# Altium PCB FYP_POWERBOARD_60V100A_REV2.PcbDoc
Units mm, origin at the board's own origin, x right, y up, seen from the top; angles counter-clockwise.
Board outline 32.45 x 70.99 mm, 2 copper layers (Top Layer, Bottom Layer); 48 components, 39 nets, 215 pads, 937 vias.
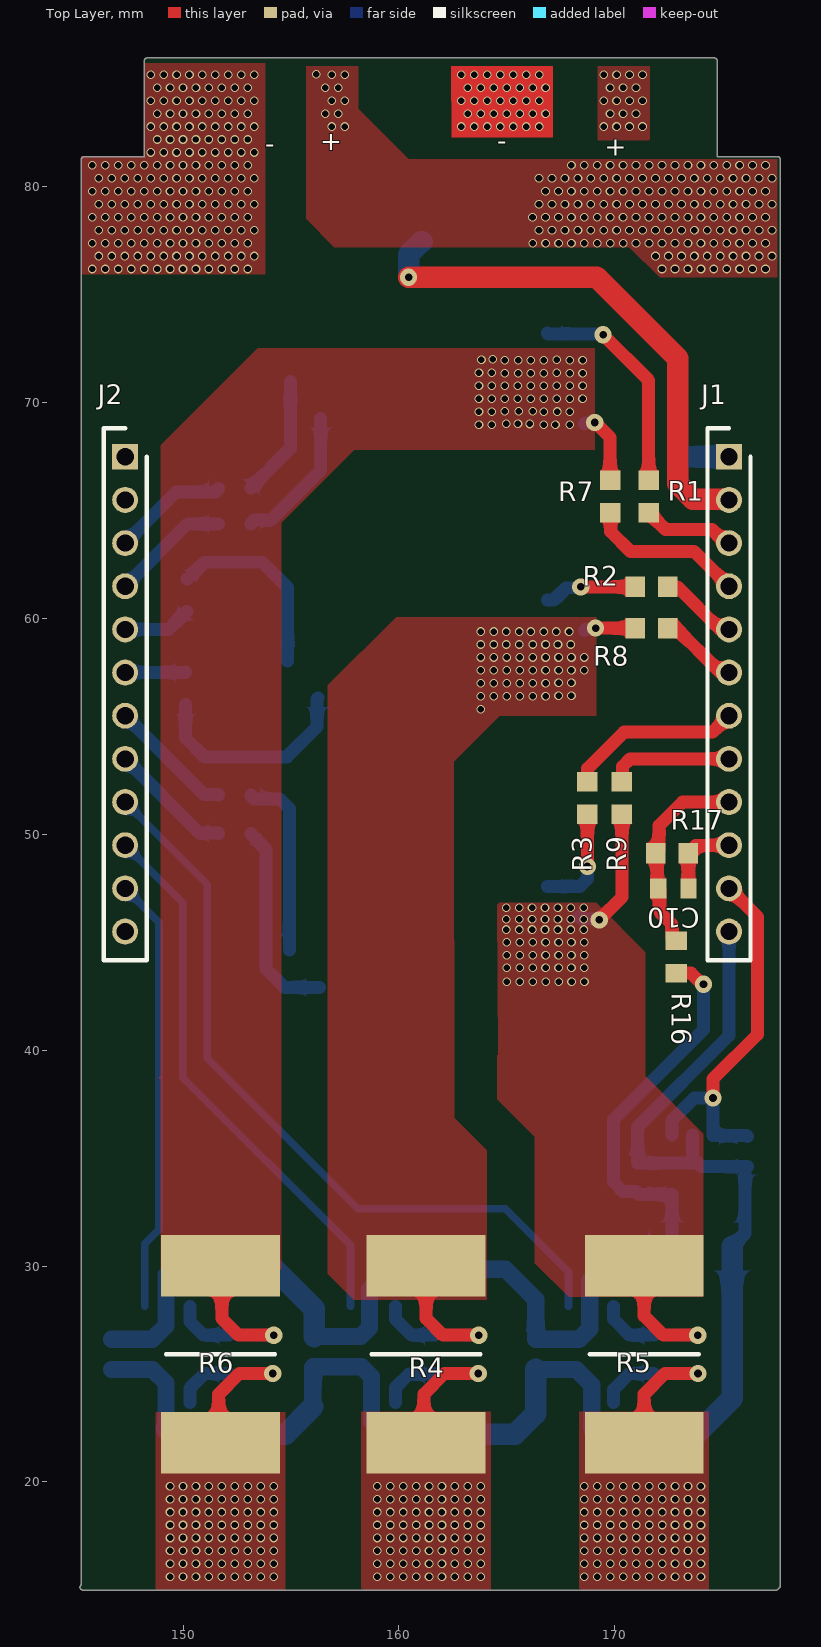
[diagram p0: Top Layer view]
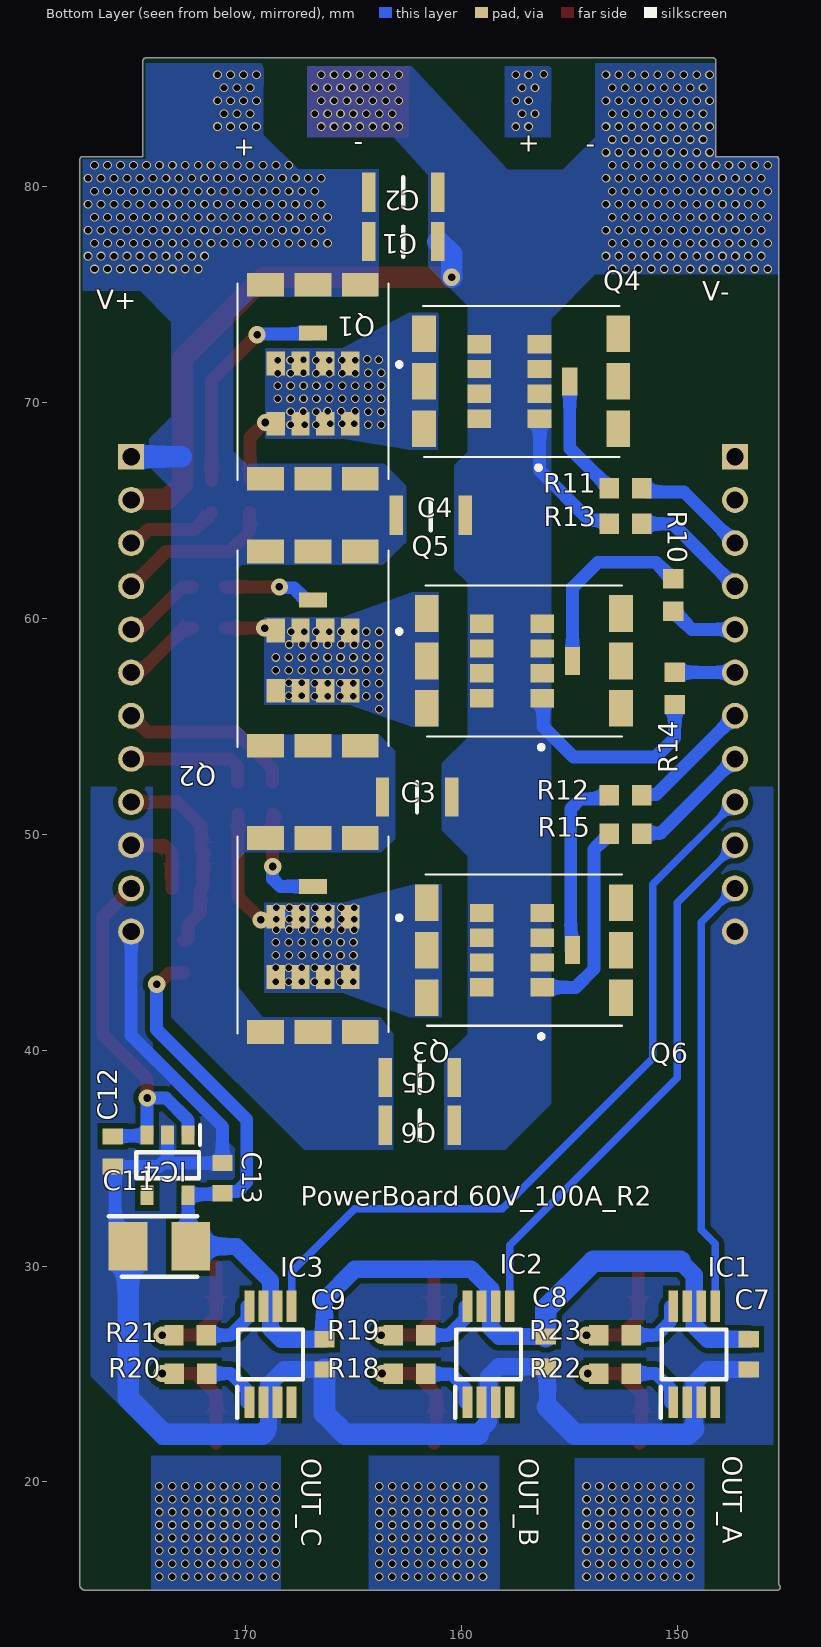
[diagram p1: Bottom Layer view, seen from below]
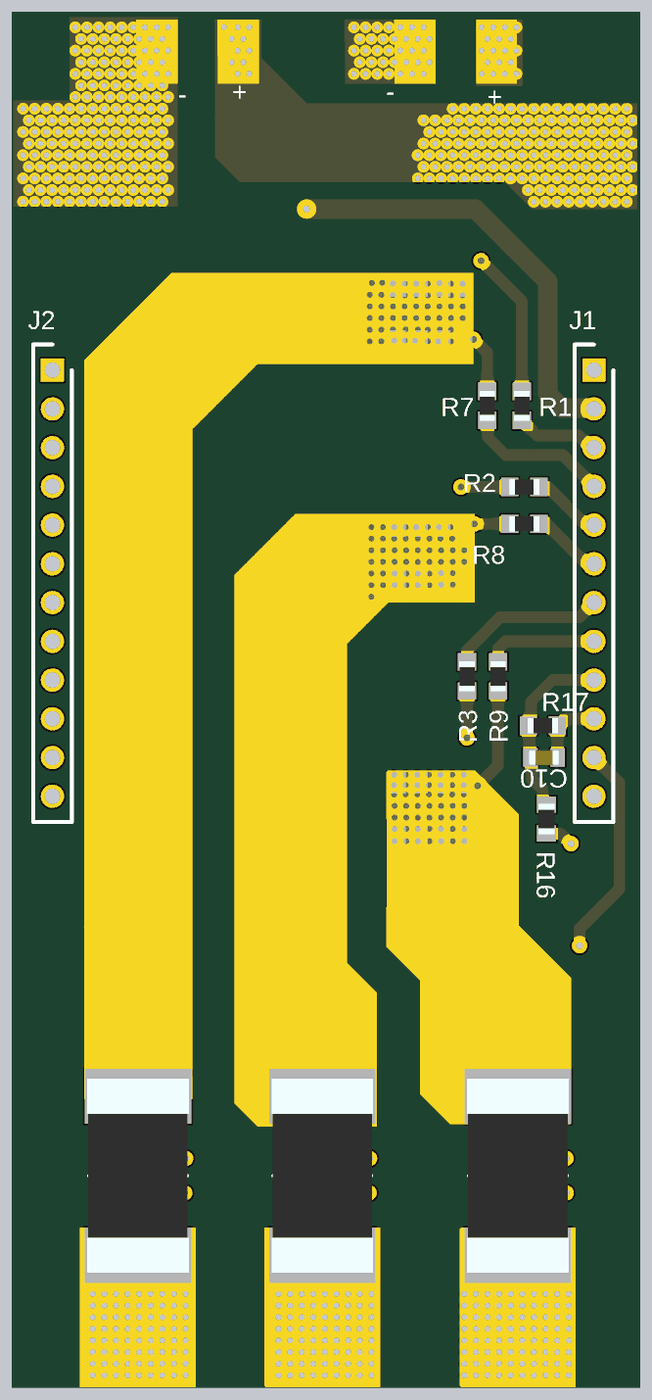
[diagram p2: 3D render of the assembled board from above, using the file's embedded part models]
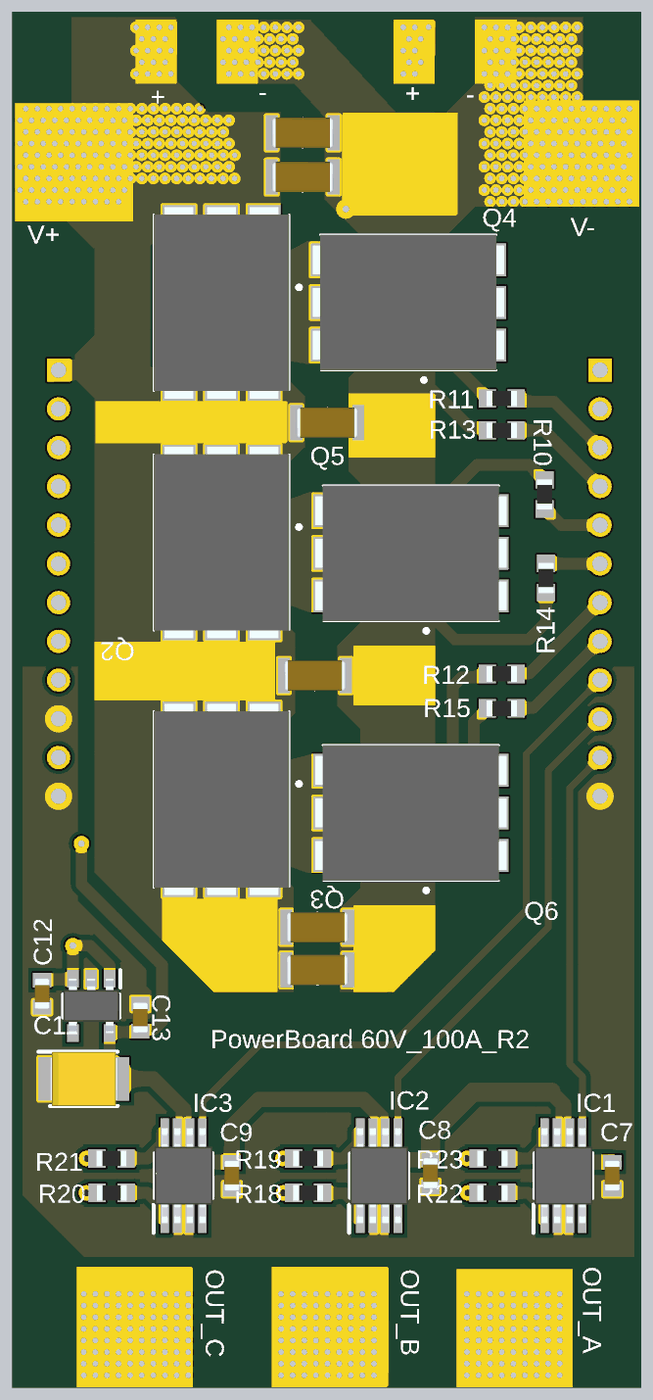
[diagram p3: 3D render of the assembled board from below, using the file's embedded part models]

## Layer stack, top to bottom
Top Solder: solder mask 0.0102, Solder Resist, Dk 3.5
Top Layer: signal copper 0.0356
Dielectric 1: dielectric 0.32, FR-4, Dk 4.8
Bottom Layer: signal copper 0.0356
Bottom Solder: solder mask 0.0102, Solder Resist, Dk 3.5

## Board outline
145.288,15.223 145.288,81.28 cw(c145.415,81.28) 145.415,81.407 148.209,81.407 148.209,85.852 cw(c148.336,85.852) 148.336,85.979 174.625,85.979 cw(c174.625,85.852) 174.752,85.852 174.752,81.407 177.546,81.407 cw(c177.546,81.28) 177.673,81.28 177.673,15.176 cw(c177.546,15.176) 177.599,15.06 cw(c177.482,15.113) 177.482,14.986 145.351,14.986 cw(c145.351,15.113)

## Design rules (kind name [scope] priority, off if disabled: settings)
Clearance [All] p1: gap=0.25 ignorepadtopadclearanceinfootprint=TRUE
PlaneConnect [All] p1: planeconnectstyle=Direct reliefexpansion=0.508 reliefentries=4 reliefconductorwidth=0.254 reliefairgap=0.254
PolygonConnect [All] p1: connectstyle=Direct reliefconductorwidth=0.254 reliefentries=4 polygonreliefangle="90 Angle" airgapwidth=0.254
RoutingCorners [All] p1: cornerstyle=Round minsetback=0.8 maxsetback=2.54
RoutingTopology [InNet('C_B')] p1: topology=Starburst
RoutingVias [All] p1: holewidth=0.35 width=0.8 viastyle="Through Hole" minholewidth=0.3 minwidth=0.4 maxholewidth=0.711 maxwidth=1.27
SolderMaskExpansion [All] p1: expansion=0.102 istentingtop=FALSE soldermaskfromhole=TRUE
UnRoutedNet [All] p1: checkbadconnections=TRUE
UnpouredPolygon [All] p1: allowunpoured=TRUE
Width [All] p1: maxlimit=1 minlimit=0.254 preferedwidth=0.6 checkconnectedcopper=TRUE
25 further rules are at their usual default settings.

## Components (designator, comment, footprint, x,y, rotation, side; value= is the part's Value field where it differs from the comment)
C1 "C3216X7S2A225K160AB" CAPC3216X180N 162.687,77.47 r0 bottom
C2 "C3216X7S2A225K160AB" CAPC3216X180N 162.687,79.756 r0 bottom
C3 "C3216X7S2A225K160AB" CAPC3216X180N 162.052,51.729 r0 bottom
C4 "C3216X7S2A225K160AB" CAPC3216X180N 161.417,64.789 r0 bottom
C5 "C3216X7S2A225K160AB" CAPC3216X180N 161.925,38.735 r0 bottom
C6 "C3216X7S2A225K160AB" CAPC3216X180N 161.925,36.521 r0 bottom
C7 "2.2u" CAPC1608X90N 146.685,25.908 r270 bottom
C8 "2.2u" CAPC1608X90N 156.083,26.035 r270 bottom
C9 "2.2u" CAPC1608X90N 166.342,25.908 r270 bottom
C10 "2.2u" CAPC1608X90N 172.72,47.498 r180 top
C11 "tantalum cap, 1210, 100uF" CAPPM3528X210N 173.991,30.908 r180 bottom
C12 "2.2u" CAPC1608X90N 176.149,35.306 r90 bottom
C13 "2.2u" CAPC1608X90N 171.069,34.071 r270 bottom
IC1 "AD8418AWBRZ" SOP65P490X110-8N 149.212,25.908 r90 bottom
IC2 "AD8418AWBRZ" SOP65P490X110-8N 158.737,25.908 r90 bottom
IC3 "AD8418AWBRZ" SOP65P490X110-8N 168.841,25.908 r90 bottom
IC4 "XC6220B331MR-G" SOT95P280X120-5N 173.609,34.671 r270 bottom
J1 "M22-2011205" HDRV12W60P0X200_1X12_2415X200X525P 175.3,67.499 r270 top
J2 "M22-2011205" HDRV12W60P0X200_1X12_2415X200X525P 147.32,67.499 r270 top
Q1 "AUIRF7749L2TR" IRF7749L2TRPBF 166.878,70.976 r270 bottom
Q2 "AUIRF7749L2TR" IRF7749L2TRPBF 166.878,58.604 r270 bottom
Q3 "AUIRF7749L2TR" IRF7749L2TRPBF 166.878,45.339 r270 bottom
Q4 "AUIRF7749L2TR" IRF7749L2TRPBF 157.226,70.993 r0 bottom
Q5 "AUIRF7749L2TR" IRF7749L2TRPBF 157.099,58.039 r0 bottom
Q6 "AUIRF7749L2TR" IRF7749L2TRPBF 157.099,44.637 r0 bottom
R1 "4R7" RESC1608X55N 171.577,65.659 r90 top
R2 "4R7" RESC1608X55N 171.704,61.468 r180 top
R3 "4R7" RESC1608X55N 168.741,51.689 r270 top
R4 "CSS2H-3920R-L500F" RESC10052X137N 161.262,25.908 r90 top
R5 "CSS2H-3920R-L500F" RESC10052X137N 171.366,25.908 r90 top
R6 "CSS2H-3920R-L500F" RESC10052X137N 151.737,25.908 r90 top
R7 "0R" RESC1608X55N 169.786,65.659 r90 top
R8 "0R" RESC1608X55N 171.704,59.563 r180 top
R9 "0R" RESC1608X55N 170.341,51.689 r270 top
R10 "4R7" RESC1608X55N 150.187,61.087 r90 bottom
R11 "4R7" RESC1608X55N 152.4,66.04 r0 bottom
R12 "4R7" RESC1608X55N 152.4,51.816 r0 bottom
R13 "0R" RESC1608X55N 152.4,64.389 r0 bottom
R14 "0R" RESC1608X55N 150.114,56.769 r270 bottom
R15 "0R" RESC1608X55N 152.4,50.038 r0 bottom
R16 "CRCW060310K0JNTC" RESC1608X50N 172.847,44.323 r90 top
R17 "10k" RESC1608X55N 172.659,49.137 r0 top
R18 "0R" RESC1608X55N 162.405,25.019 r0 bottom
R19 "0R" RESC1608X55N 162.405,26.797 r0 bottom
R20 "0R" RESC1608X55N 172.553,25.019 r0 bottom
R21 "0R" RESC1608X55N 172.565,26.797 r0 bottom
R22 "0R" RESC1608X55N 152.88,25.019 r0 bottom
R23 "0R" RESC1608X55N 152.88,26.797 r0 bottom

## Footprints (in the part's own frame and the unit in brackets; to place one, negate y for a bottom-side part, rotate by r counter-clockwise, add the part's x,y. Pads: shape width x height; smd on the part's side, far side on the other; paste and mask are expansions set on the pad)
CAPC1608X90N [mm]
  rect 0.75x0.94 smd: 1(-0.7,0) 2(0.7,0)
  body extent -0.8,-0.4 0.8,0.4, height 0.9
CAPC3216X180N [mm]
  rect 0.62x1.82 smd: 1(-1.6,0) 2(1.6,0)
  silkscreen extent 0,-0.7 0,0.7, body extent -1.6,-0.8 1.6,0.8, height 1.8
CAPPM3528X210N [mm]
  rect 1.8x2.25 smd: 1(-1.45,0) 2(1.45,0)
  silkscreen extent -2.35,-1.4 1.75,1.4, body extent -1.75,-1.4 1.75,1.4, height 2.1
HDRV12W60P0X200_1X12_2415X200X525P [mm]
  rect 1.2x1.2 hole 0.8: 1(0,0)
  round 1.2 hole 0.8: 2(2,0) 3(4,0) 4(6,0) 5(8,0) 6(10,0) 7(12,0) 8(14,0) 9(16,0) 10(18,0) 11(20,0) 12(22,0)
  silkscreen extent -1.33,-1 23.33,1
IRF7749L2TRPBF [mm]
  rect 1.1x0.85 smd: 1(-0.85,1.725) 2(-0.85,0.575) 3(-0.85,-0.575) 4(-0.85,-1.725) 5(1.95,1.725) 6(1.95,0.575) 7(1.95,-0.575) 8(1.95,-1.725)
  rect 0.7x1.3 smd: 9(-2.25,0)
  rect 1.1x1.7 smd: 10(4.5,2.2) 11(4.5,0) 12(4.5,-2.2) 13(-4.5,2.2) 14(-4.5,0) 15(-4.5,-2.2)
  silkscreen extent -4.55,-3.5 4.55,4.1, body extent -4.94,-3.5 4.94,3.5, height 1.1
RESC1608X50N [mm]
  rect 0.85x1 smd: 1(-0.75,0) 2(0.75,0)
  body extent -0.79,-0.42 0.79,0.42, height 0.5
RESC1608X55N [mm]
  rect 0.9x0.95 smd: 1(-0.75,0) 2(0.75,0)
  body extent -0.78,-0.4 0.78,0.4, height 0.55
RESC10052X137N [mm]
  rect 2.85x5.5 smd: 1(-4.1,0) 2(4.1,0)
  silkscreen extent 0,-2.52 0,2.52, body extent -5,-2.63 5,2.63, height 1.37
SOP65P490X110-8N [mm]
  rect 1.45x0.45 smd: 1(-2.225,0.975) 2(-2.225,0.325) 3(-2.225,-0.325) 4(-2.225,-0.975) 5(2.225,-0.975) 6(2.225,-0.325) 7(2.225,0.325) 8(2.225,0.975)
  silkscreen extent -2.95,-1.5 1.15,1.55, body extent -2.45,-1.5 2.45,1.5, height 1.1
SOT95P280X120-5N [mm]
  rect 0.9x0.6 smd: 1(-1.4,0.95) 2(-1.4,0) 3(-1.4,-0.95) 4(1.4,-0.95) 5(1.4,0.95)
  silkscreen extent -1.85,-1.45 0.6,1.5, body extent -1.4,-1.45 1.4,1.45, height 1.2

## Part data
C1 C2 C3 C4 C5 C6: "Capacitor", Manufacturer_Name=TDK, Mouser Part Number=810-C3216X7S2A225K, RS Part Number=7883079P, Datasheet Link=https://product.tdk.com/info/en/catalog/datasheets/mlcc_commercial_midvoltage_en.pdf, Height=1.8mm, Manufacturer_Part_Number=C3216X7S2A225K160AB, Mouser Price/Stock=https://www.mouser.com/Search/Refine.aspx?Keyword=810-C3216X7S2A225K, RS Price/Stock=http://uk.rs-online.com/web/p/products/7883079P
C7 C8 C9 C10 C12 C13: library part GCM188R70J225KE22D, "Capacitor", Manufacturer_Name="Murata Electronics", Mouser Part Number=81-GCM188R70J225KE2D, RS Part Number=8151272P, Datasheet Link=https://psearch.en.murata.com/capacitor/product/GCM188R70J225KE22%23.pdf, Height=0.9mm, Manufacturer_Part_Number=GCM188R70J225KE22D, Mouser Price/Stock=https://www.mouser.com/Search/Refine.aspx?Keyword=81-GCM188R70J225KE2D, RS Price/Stock=http://uk.rs-online.com/web/p/products/8151272P
C11: library part 293D107X06R3B2TE3, "Capacitor Polarised", Manufacturer_Name=Vishay, Mouser Part Number=N/A, Datasheet Link=http://www.vishay.com/docs/40002/293d.pdf, Height=2.1mm, Manufacturer_Part_Number=293D107X06R3B2TE3, Mouser Price/Stock=https://www.mouser.com/Search/Refine.aspx?Keyword=N%2FA
IC1 IC2 IC3: "Integrated Circuit", Manufacturer_Name="Analog Devices", Mouser Part Number=584-AD8418AWBRZ, RS Part Number=7989903, Datasheet Link=http://www.analog.com/media/en/technical-documentation/data-sheets/AD8418A.pdf, Height=1.1mm, Manufacturer_Part_Number=AD8418AWBRZ, Mouser Price/Stock=https://www.mouser.com/Search/Refine.aspx?Keyword=584-AD8418AWBRZ, RS Price/Stock=https://uk.rs-online.com/web/p/products/7989903
IC4: "Integrated Circuit", Manufacturer_Name=Torex, Mouser Part Number=865-XC6220B331MR-G, Datasheet Link=https://media.digikey.com/pdf/Data%20Sheets/Torex/XC6220.pdf, Height=1.2mm, Manufacturer_Part_Number=XC6220B331MR-G, Mouser Price/Stock=https://www.mouser.com/Search/Refine.aspx?Keyword=865-XC6220B331MR-G
J1 J2: "Connector", Manufacturer_Name=HARWIN, Mouser Part Number=855-M22-2011205, RS Part Number=1730943, Datasheet Link=https://cdn.harwin.com/pdfs/M22-201.pdf, Height=5.25mm, Manufacturer_Part_Number=M22-2011205, Mouser Price/Stock=https://www.mouser.com/Search/Refine.aspx?Keyword=855-M22-2011205, RS Price/Stock=https://uk.rs-online.com/web/p/products/1730943, System=Connector
Q1 Q2 Q3 Q4 Q5 Q6: "MOSFET (N-Channel)", Manufacturer_Name=Infineon, Mouser Part Number=942-AUIRF7749L2TR, Datasheet Link=https://www.mouser.com/datasheet/2/196/auirf7749l2-1225782.pdf, Height=1mm, Manufacturer_Part_Number=AUIRF7749L2TR, Mouser Price/Stock=https://www.mouser.com/Search/Refine.aspx?Keyword=942-AUIRF7749L2TR
R1 R2 R3 R7 R8 R9 R10 R11 R12 R13 R14 R15 R17 R18 R19 R20 R21 R22 R23: library part CPF0603B100RE, "Resistor", Manufacturer_Name="TE Connectivity", Mouser Part Number=279-CPF0603B100RE, RS Part Number=6661951P, Allied_Number=70286645, Allied Price/Stock=https://www.alliedelec.com/te-connectivity-cpf0603b100re/70286645/, Datasheet Link=http://www.farnell.com/datasheets/1786775.pdf, Height=0.55mm, Manufacturer_Part_Number=CPF0603B100RE, Mouser Price/Stock=https://www.mouser.com/Search/Refine.aspx?Keyword=279-CPF0603B100RE, RS Price/Stock=http://uk.rs-online.com/web/p/products/6661951P
R4 R5 R6: "Resistor", Manufacturer_Name=Bourns, Mouser Part Number=652-CSS2H3920RL500F, RS Part Number=1348150, Allied_Number=70883778, Allied Price/Stock=https://www.alliedelec.com/bourns-css2h-3920r-l500f/70883778/, Datasheet Link=https://componentsearchengine.com/Datasheets/2/CSS2H-3920R-L500F.pdf, Height=1.37mm, Manufacturer_Part_Number=CSS2H-3920R-L500F, Mouser Price/Stock=https://www.mouser.com/Search/Refine.aspx?Keyword=652-CSS2H3920RL500F, RS Price/Stock=http://uk.rs-online.com/web/p/products/1348150
R16: "Resistor", Manufacturer_Name=Vishay, Datasheet Link=http://www.vishay.com/docs/20035/dcrcwe3.pdf, Height=0.5mm, Manufacturer_Part_Number=CRCW060310K0JNTC

## Via types
v1: diameter 0.4, hole 0.3, Top Layer to Bottom Layer, 922 vias
v2: diameter 0.8, hole 0.35, Top Layer to Bottom Layer, 15 vias

## Nets (pads, with @x,y where several pads share a name; then routed paths per layer and width w, separated by ;. In a path a pad name is that pad's centre, name@x,y a point inside that pad or via, vN(x,y) a via of type N, cw(c..) or ccw(c..) an arc to the next point about the centre after c; other vN are vias at no path point)
+5: C12.2 IC4.1 IC4.3 J1.11 | length 17.5
  Top Layer w0.6: v2(174.559,37.785) 174.559,38.674 176.617,40.732 176.617,46.182 J1.11
  Bottom Layer w0.6: IC4.1 172.659,36.754 173.69,37.785 v2(174.559,37.785) IC4.3 174.559,36.039 176.117,36.039 C12.2
ADC_TEMP: C10.2 J1.9 R16.2 R17.1 | length 9.7
  Top Layer w0.6: R16.2 172.772,45.073 172.647,45.198 172.647,45.847 172.095,46.399 172.095,47.423 C10.2 171.964,47.554 171.964,49.081 R17.1 172.059,49.287 172.059,50.404 173.154,51.499 J1.9
  Bottom Layer w0.6: J1.9@175.138,51.499 J1.9
C_A: IC1.5 J2.11 | length 20.3
  Bottom Layer w0.35: J2.11 148.887,45.932 148.887,31.682 148.233,31.028 IC1.5@148.233,28.133
C_B: IC2.5 J2.10 | length 25.7
  Bottom Layer w0.35: J2.10 149.987,46.832 149.987,38.735 157.762,30.96 IC2.5
C_C: IC3.5 J2.9 | length 35.9
  Bottom Layer w0.35: J2.9 151.131,47.688 151.131,39.623 158.096,32.658 164.929,32.658 167.862,29.725 167.862,28.137 IC3.5
GH_A: J1.3 R1.1 | length 4.3
  Top Layer w0.6: R1.1 172.351,64.135 174.502,64.135 175.138,63.499 J1.3
GH_B: J1.5 R2.1 | length 3.7
  Top Layer w0.6: R2.1 172.918,61.468 174.887,59.499 J1.5
GH_C: J1.7 R3.1 | length 8.2
  Top Layer w0.6: R3.1 168.741,53.044 170.434,54.737 174.538,54.737 J1.7
GL_A: J2.3 R11.1 | length 5.4
  Bottom Layer w0.6: J2.3 149.686,65.865 151.5,65.865 151.65,66.015 R11.1
GL_B: J2.5 R10.1 | length 3.2
  Bottom Layer w0.6: J2.5 149.324,59.499 150.162,60.337 R10.1
GL_C: J2.7 R12.1 | length 5.9
  Bottom Layer w0.6: J2.7 150.978,51.841 151.65,51.841 R12.1
GND: C7.2 C8.2 C9.2 C10.1 C11.1 C12.1 C13.1 IC1.2 IC1.3 IC2.2 IC2.3 IC3.2 IC3.3 IC4.2 J1.10 J1.12 J2.12 R17.2 | length 75.4
  Top Layer w0.6: C10.1 173.415,47.504 173.415,49.131 R17.2 173.409,49.162 173.559,49.312 173.584,49.312 173.771,49.499 175.27,49.499 175.285,49.514 J1.10
  Bottom Layer w0.6: IC4.2 173.609,35.017 173.855,34.771 ; J1.10@175.26,49.539 J1.10 ; J1.12 175.3,40.68 171.069,36.449 C13.1 173.609,34.771 173.855,34.771 ; C11.1 176.041,31.508 176.041,34.531 C12.1@176.116,34.606 ; C12.1 C12.1@176.116,34.606 ; 173.855,34.771 174.02,34.606 C12.1@176.116,34.606
  Bottom Layer w0.8: C7.2 148.581,25.208 149.212,24.577 149.212,23.683 149.212,22.492 149.236,22.468 ; 156.013,23.472 156.013,25.31 156.038,25.335 C8.2 158.268,25.335 158.737,24.866 158.737,23.683 158.737,22.789 159.218,22.308 ; C9.2 168.216,25.208 168.937,24.487 168.937,23.683 168.937,22.504 169.089,22.352
  Bottom Layer w1: 149.236,22.468 149.496,22.208 154.749,22.208 156.013,23.472 ; 159.218,22.208 165.382,22.208 166.342,23.168 C9.2 ; 169.089,22.352 169.233,22.208 173.78,22.208 175.441,23.869 C11.1
NetIC1_1: IC1.1 R22.1 | length 2.7
  Bottom Layer w0.6: IC1.1@150.316,23.683 150.316,24.332 151.003,25.019 R22.1
NetIC1_8: IC1.8 R23.1 | length 2.8
  Bottom Layer w0.6: IC1.8@150.316,28.133 150.316,27.431 150.95,26.797 R23.1
NetIC2_1: IC2.1 R18.1 | length 2.8
  Bottom Layer w0.6: IC2.1@159.841,23.683 159.841,24.362 160.473,24.994 161.655,24.994 R18.1
NetIC2_8: IC2.8 R19.1 | length 2.7
  Bottom Layer w0.6: IC2.8@159.841,28.133 159.841,27.543 160.587,26.797 R19.1
NetIC3_1: IC3.1 R20.1 | length 2.8
  Bottom Layer w0.6: IC3.1@169.945,23.683 169.945,24.273 170.691,25.019 R20.1
NetIC3_8: IC3.8 R21.1 | length 2.8
  Bottom Layer w0.6: IC3.8@169.945,28.133 169.945,27.543 170.691,26.797 R21.1
NetQ1_9: Q1.9 R1.2 | length 10.2
  Top Layer w0.6: v2(169.464,73.152) 171.577,71.039 R1.2
  Bottom Layer w0.6: Q1.9 166.915,73.189 169.427,73.189 v2(169.464,73.152)
NetQ2_9: Q2.9 R2.2 | length 4.3
  Top Layer w0.6: v2(168.428,61.468) R2.2
  Bottom Layer w0.6: Q2.9 167.178,60.854 167.754,61.43 168.39,61.43 v2(168.428,61.468)
NetQ3_9: Q3.9 R3.2 | length 5.2
  Top Layer w0.6: R3.2@168.615,50.813 R3.2 v2(168.741,48.514)
  Bottom Layer w0.6: Q3.9 168.39,47.589 168.741,47.94 v2(168.741,48.514)
NetQ4_9: Q4.9 R11.2 | length 5.7
  Bottom Layer w0.6: R11.2 153.15,66.065 154.976,67.891 Q4.9
NetQ5_9: Q5.9 R10.2 | length 8.9
  Bottom Layer w0.6: R10.2 150.212,61.837 150.986,62.611 153.67,62.611 154.849,61.432 Q5.9
NetQ6_9: Q6.9 R12.2 | length 8.6
  Bottom Layer w0.6: R12.2 153.15,51.791 153.3,51.641 154.48,51.641 154.931,51.19 Q6.9@154.931,44.637
OUT_A: R6.1 R22.2 | length 5.7
  Top Layer w0.6: R6.1 151.65,21.895 151.65,24.058 152.611,25.019 v2(154.153,25.019)
  Bottom Layer w0.6: R22.2 v2(154.153,25.019)
  other v1: 149.4,15.6 150,15.6 150.6,15.6 151.2,15.6 151.8,15.6 152.4,15.6 153,15.6 153.6,15.6 154.2,15.6 149.4,16.2 150,16.2 150.6,16.2 151.2,16.2 151.8,16.2 152.4,16.2 153,16.2 153.6,16.2 154.2,16.2 149.4,16.8 150,16.8 150.6,16.8 151.2,16.8 151.8,16.8 152.4,16.8 153,16.8 153.6,16.8 154.2,16.8 149.4,17.4 150,17.4 150.6,17.4 151.2,17.4 151.8,17.4 152.4,17.4 153,17.4 153.6,17.4 154.2,17.4 149.4,18 150,18 150.6,18 151.2,18 151.8,18 152.4,18 153,18 153.6,18 154.2,18 149.4,18.6 150,18.6 150.6,18.6 151.2,18.6 151.8,18.6 152.4,18.6 153,18.6 153.6,18.6 154.2,18.6 149.4,19.2 150,19.2 150.6,19.2 151.2,19.2 151.8,19.2 152.4,19.2 153,19.2 153.6,19.2 154.2,19.2 149.4,19.8 150,19.8 150.6,19.8 151.2,19.8 151.8,19.8 152.4,19.8 153,19.8 153.6,19.8 154.2,19.8
OUT_B: R4.1 R18.2 | length 5.7
  Top Layer w0.6: R4.1 161.163,21.907 161.163,24.061 162.121,25.019 v2(163.678,25.019)
  Bottom Layer w0.6: R18.2 v2(163.678,25.019)
  other v1: 159,15.6 159.6,15.6 160.2,15.6 160.8,15.6 161.4,15.6 162,15.6 162.6,15.6 163.2,15.6 163.8,15.6 159,16.2 159.6,16.2 160.2,16.2 160.8,16.2 161.4,16.2 162,16.2 162.6,16.2 163.2,16.2 163.8,16.2 159,16.8 159.6,16.8 160.2,16.8 160.8,16.8 161.4,16.8 162,16.8 162.6,16.8 163.2,16.8 163.8,16.8 159,17.4 159.6,17.4 160.2,17.4 160.8,17.4 161.4,17.4 162,17.4 162.6,17.4 163.2,17.4 163.8,17.4 159,18 159.6,18 160.2,18 160.8,18 161.4,18 162,18 162.6,18 163.2,18 163.8,18 159,18.6 159.6,18.6 160.2,18.6 160.8,18.6 161.4,18.6 162,18.6 162.6,18.6 163.2,18.6 163.8,18.6 159,19.2 159.6,19.2 160.2,19.2 160.8,19.2 161.4,19.2 162,19.2 162.6,19.2 163.2,19.2 163.8,19.2 159,19.8 159.6,19.8 160.2,19.8 160.8,19.8 161.4,19.8 162,19.8 162.6,19.8 163.2,19.8 163.8,19.8
OUT_C: R5.1 R20.2 | length 5.7
  Top Layer w0.6: R5.1 171.366,24.058 172.327,25.019 v2(173.863,25.019)
  Bottom Layer w0.6: R20.2 v2(173.863,25.019)
  other v1: 168.6,15.6 169.2,15.6 169.8,15.6 170.4,15.6 171,15.6 171.6,15.6 172.2,15.6 172.8,15.6 173.4,15.6 174,15.6 168.6,16.2 169.2,16.2 169.8,16.2 170.4,16.2 171,16.2 171.6,16.2 172.2,16.2 172.8,16.2 173.4,16.2 174,16.2 168.6,16.8 169.2,16.8 169.8,16.8 170.4,16.8 171,16.8 171.6,16.8 172.2,16.8 172.8,16.8 173.4,16.8 174,16.8 168.6,17.4 169.2,17.4 169.8,17.4 170.4,17.4 171,17.4 171.6,17.4 172.2,17.4 172.8,17.4 173.4,17.4 174,17.4 168.6,18 169.2,18 169.8,18 170.4,18 171,18 171.6,18 172.2,18 172.8,18 173.4,18 174,18 168.6,18.6 169.2,18.6 169.8,18.6 170.4,18.6 171,18.6 171.6,18.6 172.2,18.6 172.8,18.6 173.4,18.6 174,18.6 168.6,19.2 169.2,19.2 169.8,19.2 170.4,19.2 171,19.2 171.6,19.2 172.2,19.2 172.8,19.2 173.4,19.2 174,19.2 168.6,19.8 169.2,19.8 169.8,19.8 170.4,19.8 171,19.8 171.6,19.8 172.2,19.8 172.8,19.8 173.4,19.8 174,19.8
PHASE_A: Q1.1 Q1.2 Q1.3 Q1.4 Q1.5 Q1.6 Q1.7 Q1.8 Q4.10 Q4.11 Q4.12 R6.2 R7.2 R23.2 | length 9.2
  Top Layer w0.6: R6.2 151.804,29.941 151.804,27.561 152.568,26.797 v2(154.2,26.797) ; v2(169.078,69.088) 169.097,69.088 169.786,68.399 R7.2
  Bottom Layer w0.6: R23.2 v2(154.2,26.797) ; Q1.8 168.634,69.057 169.047,69.057 v2(169.078,69.088)
  other v1: 163.714,68.99 164.314,68.99 166.714,68.99 167.259,68.99 167.914,68.99 166.067,69.02 164.973,69.026 165.521,69.029 163.714,69.59 164.314,69.59 164.914,69.604 165.565,69.604 166.2,69.6 166.714,69.59 167.333,69.594 167.914,69.59 163.714,70.19 164.314,70.19 164.914,70.19 165.514,70.19 166.114,70.19 166.714,70.19 167.314,70.19 167.914,70.19 168.514,70.19 163.714,70.79 164.314,70.79 164.914,70.79 165.514,70.79 166.114,70.79 166.714,70.79 167.314,70.79 167.914,70.79 168.514,70.79 164.914,71.374 165.526,71.365 166.114,71.365 166.714,71.365 167.914,71.365 168.514,71.365 163.714,71.39 164.314,71.39 167.314,71.39 165.526,71.965 166.114,71.965 166.714,71.965 167.914,71.965 168.514,71.965 164.914,71.974 167.314,71.99 163.83,72 164.356,72.013
PHASE_B: Q2.1 Q2.2 Q2.3 Q2.4 Q2.5 Q2.6 Q2.7 Q2.8 Q5.10 Q5.11 Q5.12 R4.2 R8.2 R19.2 | length 8.1
  Top Layer w0.6: R4.2 161.262,27.575 162.04,26.797 v2(163.703,26.797) ; v2(169.116,59.563) R8.2
  Bottom Layer w0.6: R19.2 v2(163.703,26.797) ; Q2.4 168.674,59.525 169.078,59.525 v2(169.116,59.563)
  other v1: 163.8,55.8 163.8,56.4 164.4,56.4 165.002,56.4 165.602,56.4 166.2,56.4 166.8,56.4 167.4,56.423 168,56.423 163.8,57 164.4,57 165.002,57 165.602,57 166.2,57 166.8,57 167.4,57.023 168,57.023 163.8,57.6 164.4,57.6 165,57.6 165.6,57.6 166.2,57.6 166.8,57.6 167.4,57.6 168,57.6 168.6,57.6 163.8,58.2 164.4,58.2 165,58.2 165.6,58.2 166.2,58.2 166.8,58.2 167.4,58.2 168,58.2 168.6,58.2 163.8,58.8 164.4,58.8 164.973,58.8 165.573,58.8 166.2,58.8 166.8,58.8 167.373,58.8 167.973,58.8 163.8,59.4 164.4,59.4 164.973,59.4 165.573,59.4 166.114,59.4 166.714,59.4 167.287,59.4 167.887,59.4
PHASE_C: Q3.1 Q3.2 Q3.3 Q3.4 Q3.5 Q3.6 Q3.7 Q3.8 Q6.10 Q6.11 Q6.12 R5.2 R9.2 R21.2 | length 12.1
  Top Layer w0.6: v2(169.288,46.039) 170.341,47.092 R9.2 ; R5.2 171.366,27.686 172.255,26.797 v2(173.855,26.797)
  Bottom Layer w0.6: Q3.4@168.342,46.189 168.454,46.077 168.603,46.077 169.25,46.077 v2(169.288,46.039) ; R21.2 v2(173.855,26.797)
  other v1: 165.002,43.18 165.602,43.18 166.202,43.18 166.802,43.18 167.402,43.18 168.002,43.18 168.602,43.18 165,43.815 165.6,43.815 166.2,43.815 166.8,43.815 167.4,43.815 168,43.815 168.6,43.815 165,44.4 165.6,44.4 166.2,44.4 166.8,44.4 167.4,44.4 168,44.4 168.6,44.4 165,45 165.6,45 166.2,45 166.8,45 167.4,45 168,45 168.6,45 164.973,45.593 165.573,45.593 166.173,45.593 166.773,45.593 167.373,45.593 167.973,45.593 168.573,45.593 164.973,46.077 165.573,46.077 166.173,46.077 166.773,46.077 167.373,46.077 167.973,46.077 168.573,46.077 164.973,46.609 165.573,46.609 166.173,46.609 166.773,46.609 167.373,46.609 167.973,46.609 168.573,46.609
PWRGND: C1.1 C2.1 C3.1 C4.1 C5.1 C6.1 J1.2 Q4.1 Q4.2 Q4.3 Q4.4 Q4.5 Q4.6 Q4.7 Q4.8 Q5.1 Q5.2 Q5.3 Q5.4 Q5.5 Q5.6 Q5.7 Q5.8 Q6.1 Q6.2 Q6.3 Q6.4 Q6.5 Q6.6 Q6.7 Q6.8 R13.2 R14.2 R15.2 | length 50.5
  Top Layer w1: v2(160.452,75.819) 169.164,75.819 172.918,72.065 172.918,66.25 173.631,65.537 175.262,65.537 J1.2
  Bottom Layer w0.6: R14.2 150.114,54.471 150.991,53.594 154.813,53.594 156.208,54.989 156.208,56.273 Q5.1 ; R15.2 153.15,50.013 153.85,49.313 153.85,43.762 154.7,42.912 Q6.1@156.331,42.912 ; R13.2 153.15,64.414 153.3,64.564 154.071,64.564 156.376,66.869 Q4.1
  Bottom Layer w1: v2(160.452,75.819) 160.452,76.884 161.038,77.47 C1.1
  other v1: 145.8,76.2 146.4,76.2 147,76.2 147.6,76.2 148.2,76.2 148.8,76.2 149.4,76.2 150,76.2 150.6,76.2 151.2,76.2 151.8,76.2 152.4,76.2 153,76.2 146.1,76.8 146.7,76.8 147.3,76.8 147.9,76.8 148.5,76.8 149.1,76.8 149.7,76.8 150.3,76.8 150.9,76.8 151.5,76.8 152.1,76.8 152.7,76.8 153.3,76.8 145.8,77.4 146.4,77.4 147,77.4 147.6,77.4 148.2,77.4 148.8,77.4 149.4,77.4 150,77.4 150.6,77.4 151.2,77.4 151.8,77.4 152.4,77.4 153,77.4 146.1,78 146.7,78 147.3,78 147.9,78 148.5,78 149.1,78 149.7,78 150.3,78 150.9,78 151.5,78 152.1,78 152.7,78 153.3,78 145.8,78.6 146.4,78.6 147,78.6 147.6,78.6 148.2,78.6 148.8,78.6 149.4,78.6 150,78.6 150.6,78.6 151.2,78.6 151.8,78.6 152.4,78.6 153,78.6 146.1,79.2 146.7,79.2 147.3,79.2 147.9,79.2 148.5,79.2 149.1,79.2 149.7,79.2 150.3,79.2 150.9,79.2 151.5,79.2 152.1,79.2 152.7,79.2 153.3,79.2 145.8,79.8 146.4,79.8 147,79.8 147.6,79.8 148.2,79.8 148.8,79.8 149.4,79.8 150,79.8 150.6,79.8 151.2,79.8 151.8,79.8 152.4,79.8 153,79.8 146.1,80.4 146.7,80.4 147.3,80.4 147.9,80.4 148.5,80.4 149.1,80.4 149.7,80.4 150.3,80.4 150.9,80.4 151.5,80.4 152.1,80.4 152.7,80.4 153.3,80.4 145.8,81 146.4,81 147,81 147.6,81 148.2,81 148.8,81 149.4,81 150,81 150.6,81 151.2,81 151.8,81 152.4,81 153,81 148.5,81.6 149.1,81.6 149.7,81.6 150.3,81.6 150.9,81.6 151.5,81.6 152.1,81.6 152.7,81.6 153.3,81.6 148.8,82.2 149.4,82.2 150,82.2 150.6,82.2 151.2,82.2 151.8,82.2 152.4,82.2 153,82.2 148.5,82.8 149.1,82.8 149.7,82.8 150.3,82.8 150.9,82.8 151.5,82.8 152.1,82.8 152.7,82.8 153.3,82.8 162.9,82.8 163.5,82.8 164.1,82.8 164.7,82.8 165.3,82.8 165.9,82.8 166.5,82.8 148.8,83.4 149.4,83.4 150,83.4 150.6,83.4 151.2,83.4 151.8,83.4 152.4,83.4 153,83.4 163.2,83.4 163.8,83.4 164.4,83.4 165,83.4 165.6,83.4 166.2,83.4 166.8,83.4 148.5,84 149.1,84 149.7,84 150.3,84 150.9,84 151.5,84 152.1,84 152.7,84 153.3,84 162.9,84 163.5,84 164.1,84 164.7,84 165.3,84 165.9,84 166.5,84 148.8,84.6 149.4,84.6 150,84.6 150.6,84.6 151.2,84.6 151.8,84.6 152.4,84.6 153,84.6 163.2,84.6 163.8,84.6 164.4,84.6 165,84.6 165.6,84.6 166.2,84.6 166.8,84.6 148.5,85.2 149.1,85.2 149.7,85.2 150.3,85.2 150.9,85.2 151.5,85.2 152.1,85.2 152.7,85.2 153.3,85.2 162.9,85.2 163.5,85.2 164.1,85.2 164.7,85.2 165.3,85.2 165.9,85.2 166.5,85.2
SH_A: J1.4 R7.1 | length 7.4
  Top Layer w0.6: R7.1 169.811,64.909 169.811,64.037 170.729,63.119 173.68,63.119 J1.4
SH_B: J1.6 R8.1 | length 3.7
  Top Layer w0.6: R8.1 172.847,59.563 174.796,57.614 175.185,57.614 J1.6
SH_C: J1.8 R9.1 | length 5.8
  Top Layer w0.6: R9.1 170.366,52.439 170.366,53.145 170.72,53.499 J1.8
SL_A: J2.4 R13.1 | length 5.5
  Bottom Layer w0.6: J2.4 150.21,64.389 R13.1
SL_B: J2.6 R14.1 | length 2.8
  Bottom Layer w0.6: J2.6 147.33,57.509 150.104,57.509 R14.1
SL_C: J2.8 R15.1 | length 5.8
  Bottom Layer w0.6: J2.8 150.756,50.063 151.65,50.063 R15.1
SUPPLY: C1.2 C2.2 C3.2 C4.2 C5.2 C6.2 J1.1 Q1.10 Q1.11 Q1.12 Q1.13 Q1.14 Q1.15 Q2.10 Q2.11 Q2.12 Q2.13 Q2.14 Q2.15 Q3.10 Q3.11 Q3.12 Q3.13 Q3.14 Q3.15 | length 2.3
  Bottom Layer w1: 172.978,67.499 J1.1
  other v1: 172.188,76.2 172.2,76.2 172.788,76.2 172.8,76.2 173.388,76.2 173.4,76.2 173.988,76.2 174,76.2 174.588,76.2 174.6,76.2 175.188,76.2 175.2,76.2 175.788,76.2 175.8,76.2 176.388,76.2 176.4,76.2 176.988,76.2 177,76.2 171.888,76.8 171.9,76.8 172.488,76.8 172.5,76.8 173.088,76.8 173.1,76.8 173.688,76.8 173.7,76.8 174.288,76.8 174.3,76.8 174.888,76.8 174.9,76.8 175.488,76.8 175.5,76.8 176.088,76.8 176.1,76.8 176.688,76.8 176.7,76.8 177.288,76.8 177.3,76.8 166.2,77.4 166.8,77.4 167.4,77.4 168,77.4 168.6,77.4 169.2,77.4 169.8,77.4 170.4,77.4 170.988,77.4 171,77.4 171.588,77.4 171.6,77.4 172.188,77.4 172.2,77.4 172.788,77.4 172.8,77.4 173.388,77.4 173.4,77.4 173.988,77.4 174,77.4 174.588,77.4 174.6,77.4 175.188,77.4 175.2,77.4 175.788,77.4 175.8,77.4 176.388,77.4 176.4,77.4 176.988,77.4 177,77.4 166.488,78 166.5,78 167.088,78 167.1,78 167.688,78 167.7,78 168.288,78 168.3,78 168.888,78 168.9,78 169.488,78 169.5,78 170.088,78 170.1,78 170.688,78 170.7,78 171.288,78 171.3,78 171.888,78 171.9,78 172.488,78 172.5,78 173.088,78 173.1,78 173.688,78 173.7,78 174.288,78 174.3,78 174.888,78 174.9,78 175.488,78 175.5,78 176.088,78 176.1,78 176.688,78 176.7,78 177.288,78 177.3,78 166.188,78.6 166.2,78.6 166.788,78.6 166.8,78.6 167.388,78.6 167.4,78.6 167.988,78.6 168,78.6 168.588,78.6 168.6,78.6 169.188,78.6 169.2,78.6 169.788,78.6 169.8,78.6 170.388,78.6 170.4,78.6 170.988,78.6 171,78.6 171.588,78.6 171.6,78.6 172.188,78.6 172.2,78.6 172.788,78.6 172.8,78.6 173.388,78.6 173.4,78.6 173.988,78.6 174,78.6 174.588,78.6 174.6,78.6 175.188,78.6 175.2,78.6 175.788,78.6 175.8,78.6 176.388,78.6 176.4,78.6 176.988,78.6 177,78.6 166.488,79.2 166.5,79.2 167.088,79.2 167.1,79.2 167.688,79.2 167.7,79.2 168.288,79.2 168.3,79.2 168.888,79.2 168.9,79.2 169.488,79.2 169.5,79.2 170.088,79.2 170.1,79.2 170.688,79.2 170.7,79.2 171.288,79.2 171.3,79.2 171.888,79.2 171.9,79.2 172.488,79.2 172.5,79.2 173.088,79.2 173.1,79.2 173.688,79.2 173.7,79.2 174.288,79.2 174.3,79.2 174.888,79.2 174.9,79.2 175.488,79.2 175.5,79.2 176.088,79.2 176.1,79.2 176.688,79.2 176.7,79.2 177.288,79.2 177.3,79.2 166.788,79.8 166.8,79.8 167.388,79.8 167.4,79.8 167.988,79.8 168,79.8 168.588,79.8 168.6,79.8 169.188,79.8 169.2,79.8 169.788,79.8 169.8,79.8 170.388,79.8 170.4,79.8 170.988,79.8 171,79.8 171.588,79.8 171.6,79.8 172.188,79.8 172.2,79.8 172.788,79.8 172.8,79.8 173.388,79.8 173.4,79.8 173.988,79.8 174,79.8 174.588,79.8 174.6,79.8 175.188,79.8 175.2,79.8 175.788,79.8 175.8,79.8 176.388,79.8 176.4,79.8 176.988,79.8 177,79.8 166.488,80.4 166.5,80.4 167.088,80.4 167.1,80.4 167.688,80.4 167.7,80.4 168.288,80.4 168.3,80.4 168.888,80.4 168.9,80.4 169.488,80.4 169.5,80.4 170.088,80.4 170.1,80.4 170.688,80.4 170.7,80.4 171.288,80.4 171.3,80.4 171.888,80.4 171.9,80.4 172.488,80.4 172.5,80.4 173.088,80.4 173.1,80.4 173.688,80.4 173.7,80.4 174.288,80.4 174.3,80.4 174.888,80.4 174.9,80.4 175.488,80.4 175.5,80.4 176.088,80.4 176.1,80.4 176.688,80.4 176.7,80.4 177.288,80.4 177.3,80.4 168,81 168.588,81 168.6,81 169.188,81 169.2,81 169.788,81 169.8,81 170.388,81 170.4,81 170.988,81 171,81 171.588,81 171.6,81 172.188,81 172.2,81 172.788,81 172.8,81 173.388,81 173.4,81 173.988,81 174,81 174.588,81 174.6,81 175.188,81 175.2,81 175.788,81 175.8,81 176.388,81 176.4,81 176.988,81 177,81 156.888,82.8 157.488,82.8 169.488,82.8 169.5,82.8 170.088,82.8 170.1,82.8 170.688,82.8 170.7,82.8 171.288,82.8 171.3,82.8 156.588,83.4 157.188,83.4 169.788,83.4 169.8,83.4 170.388,83.4 170.4,83.4 170.988,83.4 171,83.4 156.888,84 157.488,84 169.488,84 169.5,84 170.088,84 170.1,84 170.688,84 170.7,84 171.288,84 171.3,84 156.588,84.6 157.188,84.6 169.788,84.6 169.8,84.6 170.388,84.6 170.4,84.6 170.988,84.6 171,84.6 156.888,85.2 157.488,85.2 169.488,85.2 169.5,85.2 170.088,85.2 170.1,85.2 170.688,85.2 170.7,85.2 171.288,85.2 171.3,85.2 156.182,85.217
VCC: C7.1 C8.1 C9.1 C11.2 C13.2 IC1.6 IC1.7 IC2.6 IC2.7 IC3.6 IC3.7 IC4.5 R16.1 | length 56.6
  Top Layer w0.6: R16.1 173.543,43.573 174.063,43.053 v2(174.117,43.053)
  Bottom Layer w0.6: C11.2 172.659,31.026 IC4.5 172.659,33.321 171.119,33.321 C13.2 170.994,33.446 170.389,33.446 169.945,33.89 169.945,36.78 174.117,40.952 v2(174.117,43.053)
  Bottom Layer w0.8: C7.1 148.581,26.608 149.212,27.239 149.212,29.578 149.86,30.226 ; C8.1 158.239,26.735 158.641,27.137 158.641,28.937 159.549,29.845 164.945,29.845 166.342,28.448 C9.1 168.357,26.608 168.841,27.092 168.841,29.315 170.434,30.908 C11.2
  Bottom Layer w1: 149.86,30.226 153.877,30.226 156.083,28.02 C8.1
pads on no net: IC1.4 IC2.4 IC3.4 IC4.4 J2.1 J2.2 Q4.13 Q4.14 Q4.15 Q5.13 Q5.14 Q5.15 Q6.13 Q6.14 Q6.15

## Polygon pours and split planes (outlines as drawn)
GND on Bottom Layer "GND_L02_P058" (solid, remove dead copper, pour order 58): 174.3,52.197 177.165,52.197 177.165,24.891 173.991,21.717 145.542,21.717 145.542,52.07 145.415,52.197 147.955,52.197 151.625,48.527 151.625,39.823 158.229,33.219 168.259,33.219 174.3,39.26 174.3,52.197
OUT_C on Bottom Layer "OUT_C_L02_P056" (solid, remove dead copper, pour order 56): 168.366,21.209 174.366,21.209 174.366,14.991 168.371,14.991 168.366,14.986
OUT_B on Bottom Layer "OUT_B_L02_P050" (solid, pour order 50): 158.239,21.209 164.287,21.209 164.287,14.986 158.219,14.986
no net on Bottom Layer "Bottom Layer-No Net 1" (solid, pour order 48): 158.262,20.32
OUT_A on Bottom Layer "OUT_A_L02_P044" (solid, remove dead copper, pour order 44): 148.737,21.082 154.737,21.082 154.737,15.164 154.737,14.986 148.737,14.986
PWRGND on Bottom Layer "PWRGND_L02_P026" (solid, remove dead copper, pour order 26): 151.643,85.598 153.802,85.598 153.802,82.296 151.673,82.296
SUPPLY on Bottom Layer "SUPPLY_L02_P024" (solid, remove dead copper, pour order 24): 155.836,85.598 157.995,85.598 157.995,82.296 155.866,82.296
SUPPLY on Bottom Layer "SUPPLY_L02_P022" (solid, remove dead copper, pour order 22): 169.166,85.598 171.325,85.598 171.325,82.296 169.195,82.296
PWRGND on Bottom Layer "PWRGND_L02_P018" (solid, remove dead copper, pour order 18): 164.973,85.598 167.132,85.598 167.132,82.296 165.002,82.296
SUPPLY on Bottom Layer "SUPPLY_L02_P016" (solid, pour order 16): 173.434,66.015 174.394,66.975 174.453,66.975 174.453,68.323 173.434,69.342 173.434,73.787 173.49,73.787 174.887,75.184 177.546,75.184 177.546,81.28 174.625,81.28 174.625,85.725 169.188,85.725 169.195,85.569 169.176,82.423 167.569,80.816 167.513,80.816 163.83,80.816 163.83,74.803 163.94,74.913 169.562,74.913 170.561,73.914 170.561,67.722 170.539,67.722 169.926,67.109 169.852,67.183 163.576,67.183 162.56,66.167 162.56,63.499 162.614,63.499 163.629,62.484 170.168,62.484 170.449,62.203 170.449,55.118 169.941,54.61 163.794,54.61 163.068,53.884 163.068,49.797 163.703,49.162 170.04,49.162 170.378,48.824 170.378,42.989 169.208,41.529 163.758,41.529 163.149,40.767 163.149,35.389 167.289,35.389 173.434,41.534
PWRGND on Bottom Layer "PWRGND_L02_P010" (solid, remove dead copper, pour order 10): 155.847,80.79 155.308,80.79 153.802,82.296 153.802,85.725 148.209,85.725 148.209,81.416 145.288,81.416 145.288,75.946 153.784,75.946 155.829,73.901 155.829,73.787 155.829,38.039 155.829,37.531 157.971,35.389 160.782,35.389 160.782,39.668 159.712,40.738 159.712,48.996 160.909,50.193 160.909,53.286 159.712,54.483 159.712,61.656 160.325,62.269 160.325,67.109 159.712,67.722 159.712,74.493 161.544,76.325 161.544,80.518 161.525,80.537 163.122,82.296 167.132,82.296 167.132,85.598 162.306,85.598 157.861,80.809 155.866,80.809
PHASE_A on Bottom Layer "PHASE_A_L02_P008" (solid, remove dead copper, pour order 8): 161.036,74.168 162.433,74.168 165.526,72.517 169.078,72.517 169.078,68.326 165.526,68.326 162.433,67.818 161.087,67.818
PHASE_B on Bottom Layer "PHASE_B_L02_P006" (solid, remove dead copper, pour order 6): 161.036,61.214 162.306,61.214 165.526,60.071 169.141,60.071 169.141,56.019 165.203,56.019 162.306,54.989 161.036,54.989
PHASE_C on Bottom Layer "PHASE_C_L02_P004" (solid, pour order 4): 160.909,47.688 162.179,47.688 165.526,46.837 169.141,46.837 169.141,42.672 165.526,42.672 162.405,41.529 160.909,41.529
no net on Bottom Layer "Bottom Layer-No Net" (solid, pour order 2): 161.087,47.688
OUT_C on Top Layer "OUT_C_L01_P054" (solid, remove dead copper, pour order 54): 168.366,23.241 174.366,23.241 174.366,14.991 168.366,14.986
OUT_B on Top Layer "OUT_B_L01_P052" (solid, remove dead copper, pour order 52): 158.262,23.241 164.262,23.241 164.262,14.986 158.257,14.986
OUT_A on Top Layer "OUT_A_L01_P046" (solid, remove dead copper, pour order 46): 148.737,23.23 154.737,23.23 154.737,14.986 148.737,14.986
PHASE_C on Top Layer "PHASE_C_L01_P040" (solid, pour order 40): 164.599,39.788 164.568,39.758 164.568,37.736 166.303,36.001 166.303,30.138 167.866,28.575 174.117,28.575 174.117,36.131 171.429,38.819 171.429,44.548 169.141,46.837 164.568,46.837
PHASE_B on Top Layer "PHASE_B_L01_P038" (solid, remove dead copper, pour order 38): 157.922,28.448 156.718,29.652 156.718,56.915 159.874,60.071 169.141,60.071 169.141,55.499 164.683,55.499 162.542,53.358 162.563,36.883 164.084,35.362 164.084,28.448
PHASE_A on Top Layer "PHASE_A_L01_P036" (solid, pour order 36): 169.078,72.517 153.462,72.517 148.971,68.026 148.971,38.819 148.887,38.735 148.971,38.651 148.971,29.845 154.559,29.845 154.559,64.446 157.931,67.818 169.078,67.818
PWRGND on Top Layer "PWRGND_L01_P034" (solid, pour order 34): 153.802,85.725 153.802,75.964 153.784,75.946 145.288,75.946 145.288,81.416 148.209,81.416 148.209,85.725
no net on Top Layer "Top Layer-No Net" (solid, pour order 32): 153.802,85.598
SUPPLY on Top Layer "SUPPLY_L01_P030" (solid, remove dead copper, pour order 30): 160.464,81.28 158.115,83.629 158.115,85.598 155.702,85.598 155.702,78.53 157.016,77.216 170.688,77.216 172.085,75.819 177.546,75.819 177.546,81.28
SUPPLY on Top Layer "SUPPLY_L01_P028" (solid, pour order 28): 169.207,85.598 171.618,85.598 171.618,82.21 171.577,82.169 169.207,82.169
no net on Bottom Solder (solid): 154.686,80.79 160.601,80.79 160.627,80.816 160.655,80.788 160.655,75.493 154.758,75.493 154.686,75.565
no net on Bottom Solder (solid): 155.801,66.294 160.31,66.294 160.31,62.992 160.31,62.991 155.829,62.991
no net on Bottom Solder (solid): 155.829,53.286 160.076,53.286 160.076,50.193 155.829,50.193
no net on Bottom Solder (solid): 155.829,39.878 160.076,39.878 160.076,35.369 157.991,35.369 155.829,37.531
no net on Bottom Solder (solid): 164.262,35.369
no net on Bottom Solder (solid): 163.985,40.203 169.945,40.203 169.945,38.054 167.26,35.369 163.985,35.369
no net on Bottom Solder (solid): 163.966,53.467 173.434,53.467 173.434,50.438 163.966,50.438
no net on Bottom Solder (solid): 163.477,65.849 163.522,65.894 173.388,65.894 173.388,63.731 163.477,63.729
no net on Bottom Solder (solid): 168.366,21.209 174.366,21.209 174.366,14.991 168.371,14.991
no net on Bottom Solder (solid): 158.239,21.209 164.287,21.209 164.287,14.986 158.347,14.986 158.257,15.075
no net on Bottom Solder (solid): 148.737,21.082 154.737,21.082 154.737,14.986 148.737,14.986
no net on Bottom Solder (solid): 145.288,81.416 151.257,81.416 151.257,75.964 151.239,75.946 145.288,75.946
no net on Top Solder (solid): 169.141,46.837 171.429,44.548 171.429,38.819 174.117,36.132 174.117,31.516 171.164,28.563 167.878,28.563 166.303,30.138 166.303,36.001 164.568,37.736 164.568,46.837
no net on Top Solder (solid): 169.141,60.071 159.874,60.071 156.718,56.915 156.718,29.652 157.922,28.448 164.084,28.448 164.084,35.362 162.542,36.904 162.542,53.358 164.683,55.499 169.141,55.499
no net on Top Solder (solid): 169.078,72.517 153.462,72.517 148.971,68.026 148.971,31.496 154.547,31.496 154.559,31.508 154.559,64.446 157.931,67.818 169.078,67.818
no net on Top Solder (solid): 169.047,72.39
no net on Top Solder (solid): 168.366,23.241 174.366,23.241 174.366,14.991 168.371,14.991
no net on Top Solder (solid): 158.262,23.241 164.262,23.241 164.262,15.011 164.287,14.986 158.257,14.986
no net on Top Solder (solid): 148.737,23.23 154.737,23.23 154.737,14.986 148.737,14.986

## Other copper
Top Layer:
  region net PWRGND: 162.418,85.598 167.129,85.598 167.129,82.296 162.448,82.296

## Silkscreen, mask and mechanical layers (free items; w line width, h text height)
Top Overlay:
  text "+" at 157.383,81.407 h1.52
  text "-" at 165,81.416 h1.52
  text "-" at 154.246,81.28 h1.52
  text "+" at 170.561,81.153 h1.52
Bottom Overlay:
  text "-" at 164.988,81.407 h1.52
  text "+" at 157.39,81.341 h1.52
  text "-" at 154.246,81.28 h1.52
  text "+" at 170.561,81.153 h1.52
  text "V-" at 148.844,74.422 h1.52
  text "V+" at 176.911,74.041 h1.52
  text "PowerBoard 60V_100A_R2" at 167.453,32.494 h1.52
  text "OUT_A" at 148.2,21.209 h1.52 r90
  text "OUT_B" at 157.607,21.082 h1.52 r90
  text "OUT_C" at 167.688,21.082 h1.52 r90
Top Solder:
  region: 151.643,85.598 153.802,85.598 153.802,82.296 151.673,82.296
  region: 155.836,85.598 157.995,85.598 157.995,82.296 155.866,82.296
  region: 164.973,85.598 167.132,85.598 167.132,82.296 165.002,82.296
  region: 169.166,85.598 171.325,85.598 171.325,82.296 169.195,82.296
Bottom Solder:
  region: 177.546,81.28 171.45,81.28 171.45,75.184 177.546,75.184
  region: 151.625,85.598 153.784,85.598 153.784,82.296 151.654,82.296
  region: 155.829,85.598 157.988,85.598 157.988,82.296 155.858,82.296
  region: 169.166,85.598 171.325,85.598 171.325,82.296 169.195,82.296
  region: 164.973,85.598 167.132,85.598 167.132,82.296 165.002,82.296
Mechanical 1:
  lines w0.254: 145.351,15.113 148.653,15.113 177.482,15.113 ; 145.415,15.176 145.415,25.781 145.415,70.739 145.415,81.28 148.336,81.28 148.336,85.852 174.625,85.852 174.625,81.28 177.546,81.28 177.546,70.739 177.546,25.781 177.546,15.176